# EAGLE board Ball Detection v4 Panel (EAGLE 9.2.2)
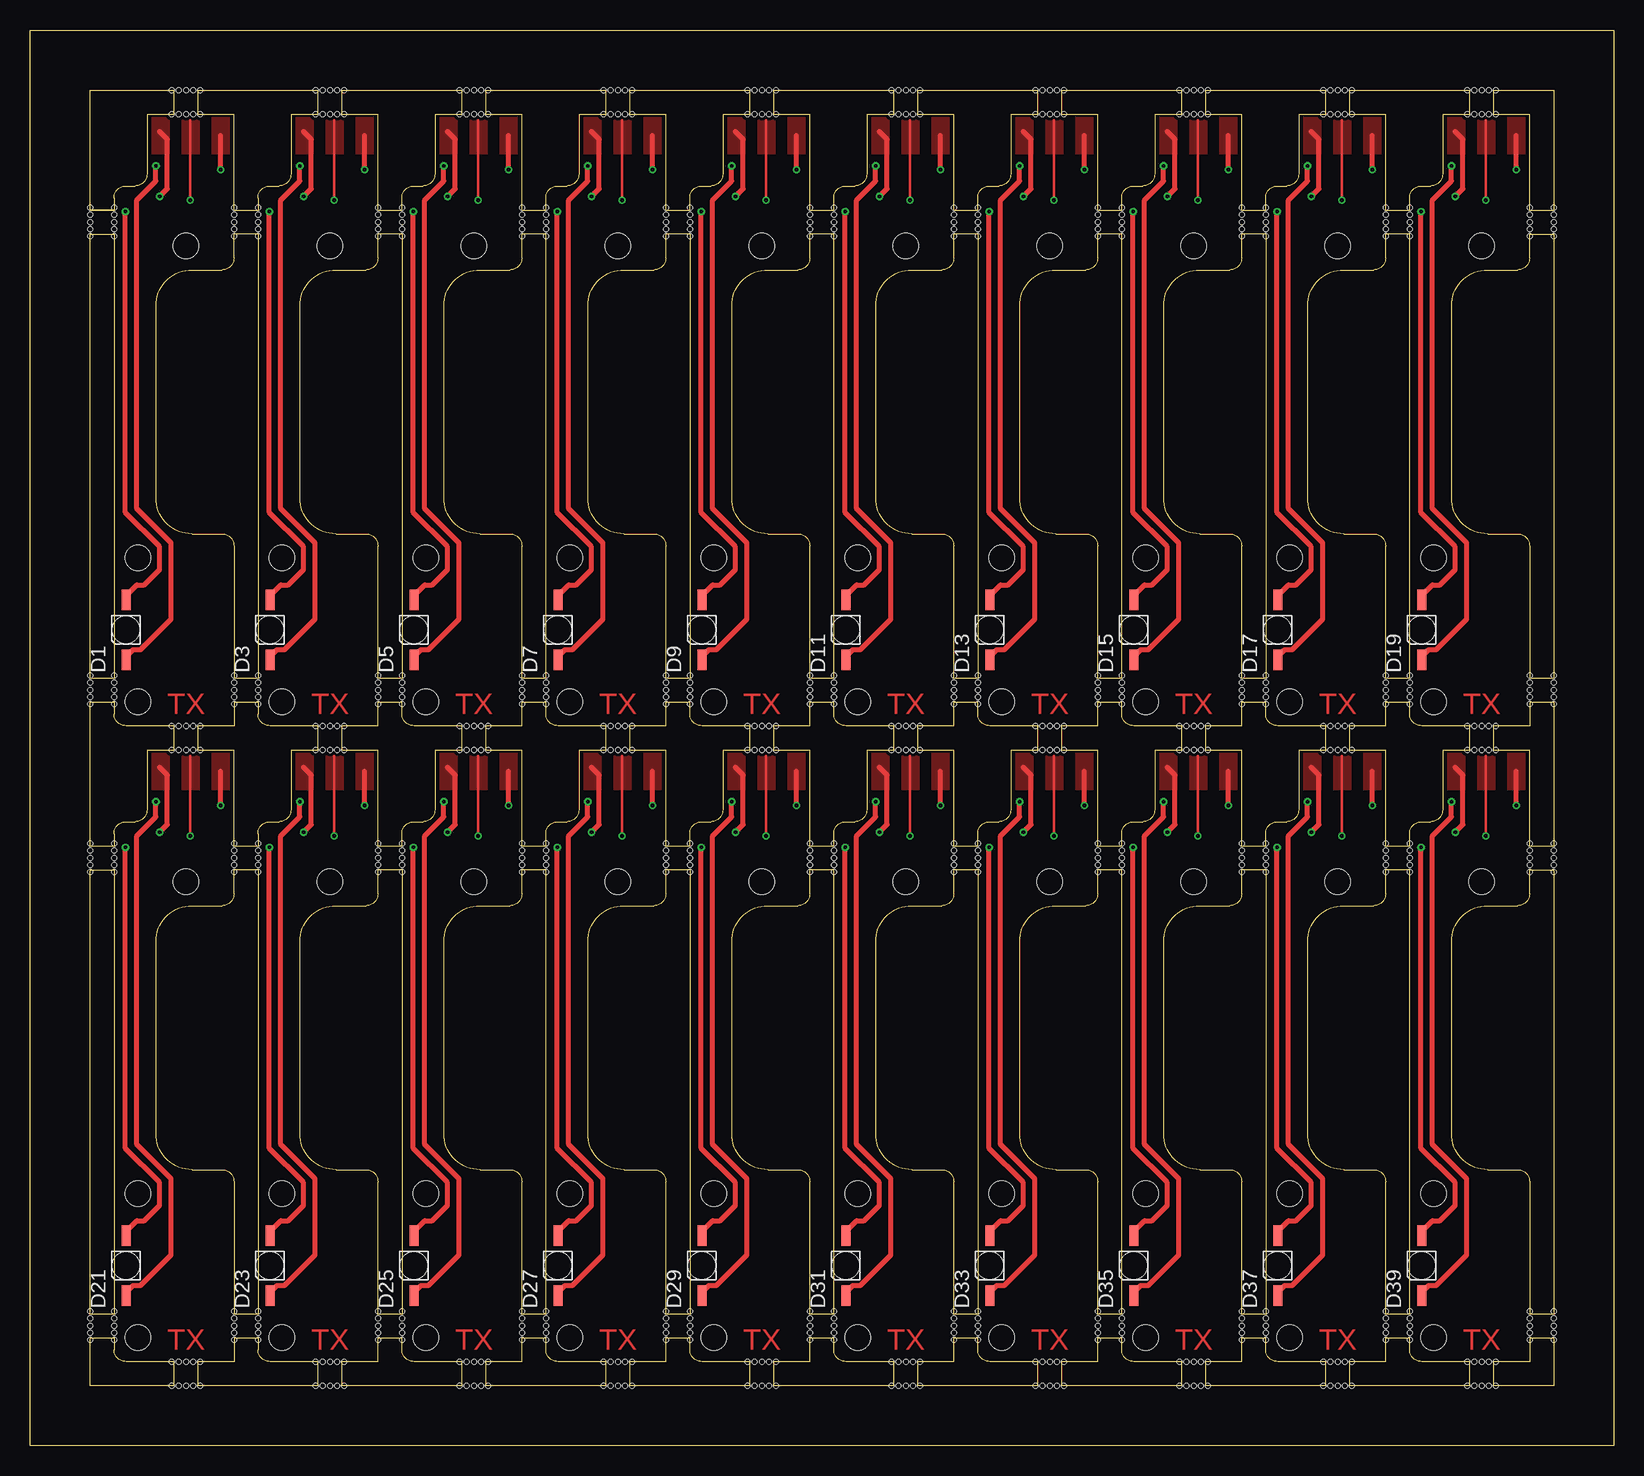
[diagram p0: board, top side]
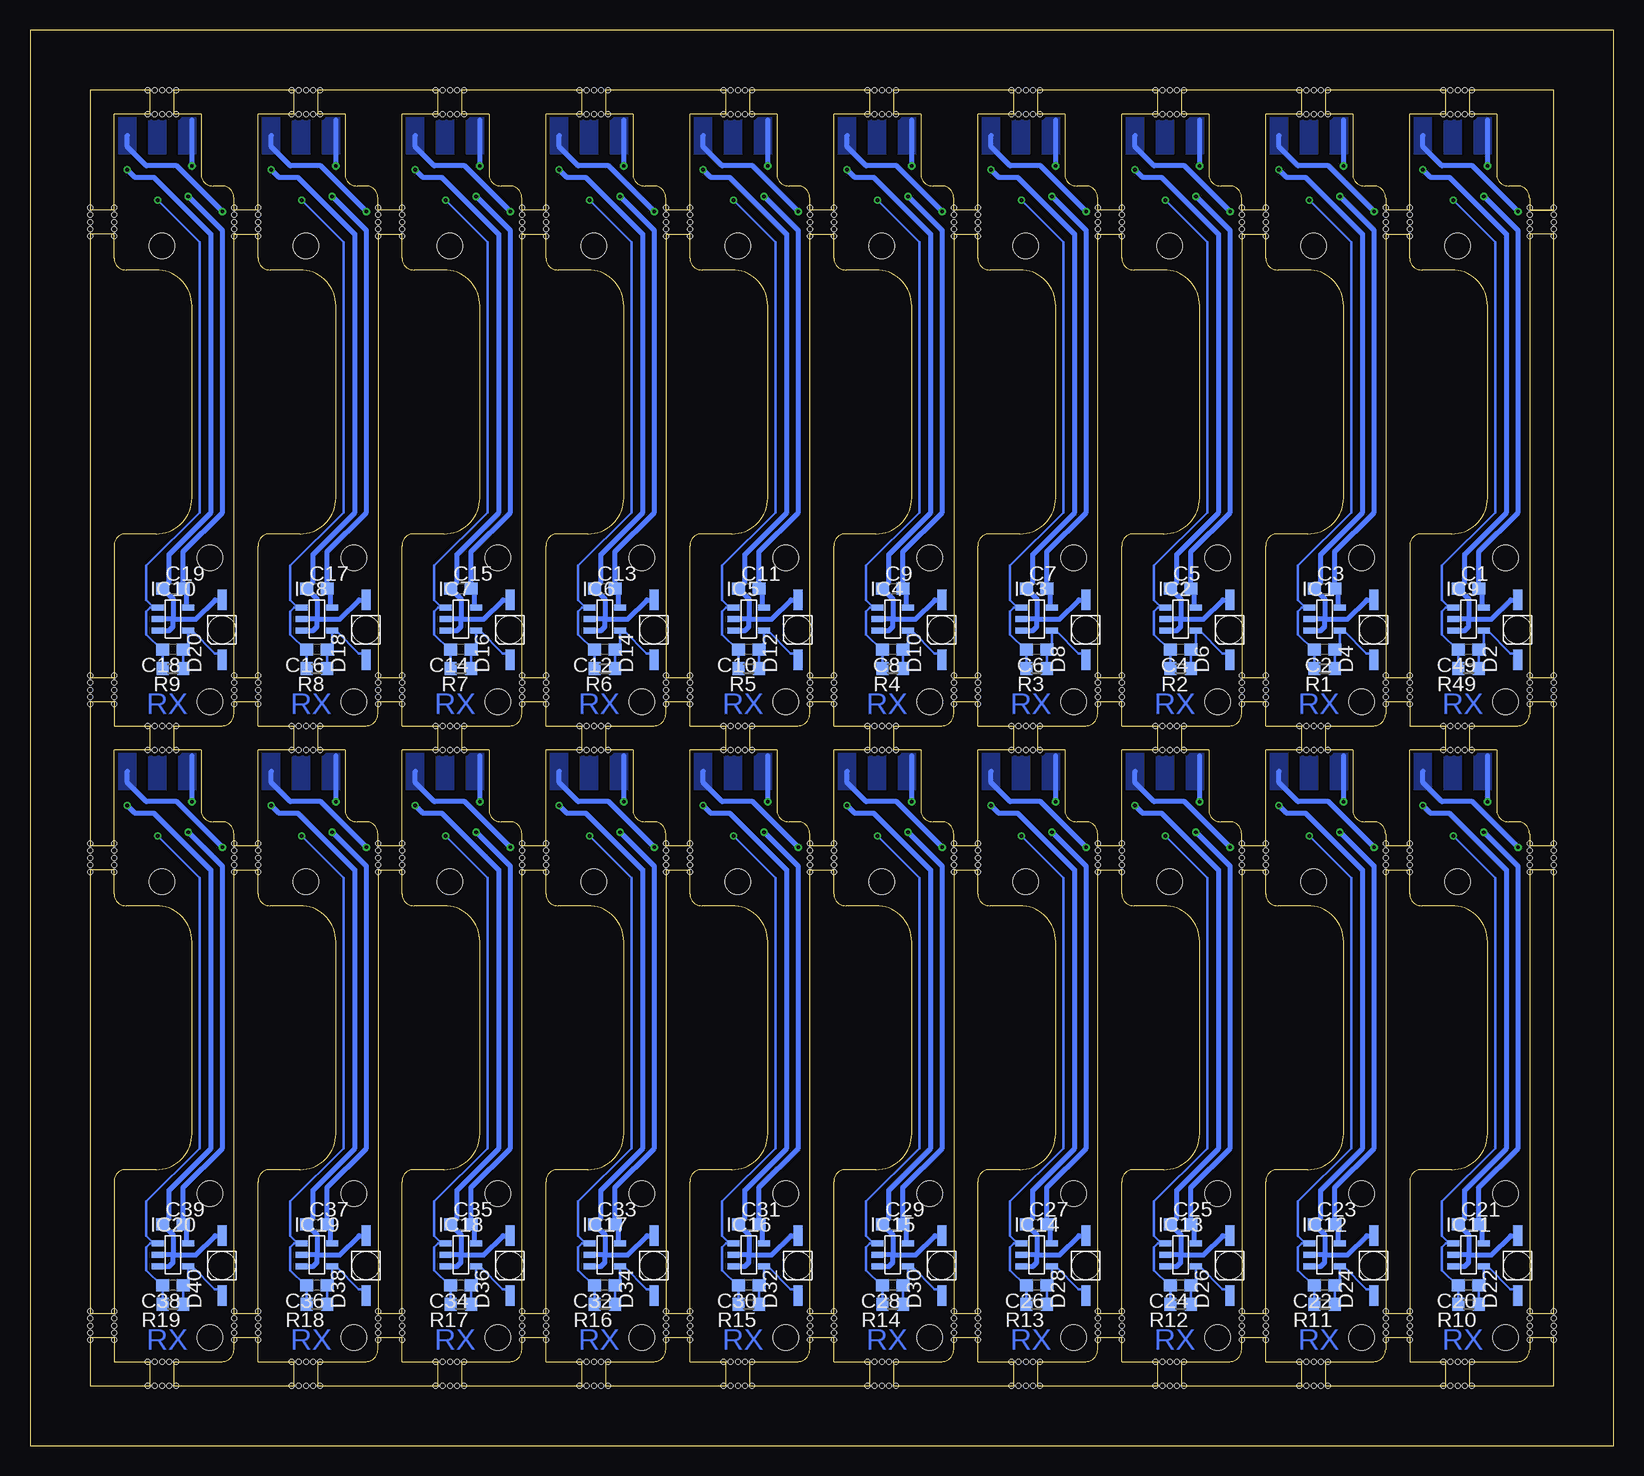
[diagram p1: board, bottom side, seen from below]

Size 132 x 118 mm. Coordinates in mm from the lower left corner, seen from the top.
Outline: 0,118 132,118 132,0 0,0 0,118
Copper layers (1*16): Top 0.035mm / dielectric 1.5mm / Bottom 0.035mm
Design rules "PCB-POOL Standard *": minimum track width 0.15mm, minimum drill 0.3mm, track to track 0.15mm, track to pad 0.15mm, pad to pad 0.15mm, via to via 0.15mm, smd to smd 0.15mm, copper to edge 0.3mm, drill to drill 0.2mm, minimum pad ring 0.2mm, minimum via ring 0.15mm, stop-mask expansion 0.075mm, vias tented up to drill 14mil, thermal gap 0.2mm
Net classes: 0 default: width 0.152 mm, clearance 0.152 mm
Holes 2.1 mm at 9,62 9,74 13,100 21,62 21,74 25,100 33,62 33,74 37,100 45,62 45,74 49,100 57,62 57,74 61,100 69,62 69,74 73,100 81,62 81,74 85,100 93,62 93,74 97,100 105,62 105,74 109,100 117,62 117,74 121,100 9,9 9,21 13,47 21,9 21,21 25,47 33,9 33,21 37,47 45,9 45,21 49,47 57,9 57,21 61,47 69,9 69,21 73,47 81,9 81,21 85,47 93,9 93,21 97,47 105,9 105,21 109,47 117,9 117,21 121,47
Holes 0.4 mm at 29,102 29,101.4 29,100.8 29,102.6 29,103.2 31,102 31,101.4 31,100.8 31,102.6 31,103.2 29,63 29,62.4 29,61.8 29,63.6 29,64.2 31,63 31,62.4 31,61.8 31,63.6 31,64.2 41,102 41,101.4 41,100.8 41,102.6 41,103.2 43,102 43,101.4 43,100.8 43,102.6 43,103.2 41,63 41,62.4 41,61.8 41,63.6 41,64.2 43,63 43,62.4 43,61.8 43,63.6 43,64.2 53,102 53,101.4 53,100.8 53,102.6 53,103.2 55,102 55,101.4 55,100.8 55,102.6 55,103.2 53,63 53,62.4 53,61.8 53,63.6 53,64.2 55,63 55,62.4 55,61.8 55,63.6 55,64.2 65,102 65,101.4 65,100.8 65,102.6 65,103.2 67,102 67,101.4 67,100.8 67,102.6 67,103.2 65,63 65,62.4 65,61.8 65,63.6 65,64.2 67,63 67,62.4 67,61.8 67,63.6 67,64.2 77,102 77,101.4 77,100.8 77,102.6 77,103.2 79,102 79,101.4 79,100.8 79,102.6 79,103.2 77,63 77,62.4 77,61.8 77,63.6 77,64.2 79,63 79,62.4 79,61.8 79,63.6 79,64.2 89,102 89,101.4 89,100.8 89,102.6 89,103.2 91,102 91,101.4 91,100.8 91,102.6 91,103.2 89,63 89,62.4 89,61.8 89,63.6 89,64.2 91,63 91,62.4 91,61.8 91,63.6 91,64.2 101,102 101,101.4 101,100.8 101,102.6 101,103.2 103,102 103,101.4 103,100.8 103,102.6 103,103.2 101,63 101,62.4 101,61.8 101,63.6 101,64.2 103,63 103,62.4 103,61.8 103,63.6 103,64.2 113,102 113,101.4 113,100.8 113,102.6 113,103.2 115,102 115,101.4 115,100.8 115,102.6 115,103.2 113,63 113,62.4 113,61.8 113,63.6 113,64.2 115,63 115,62.4 115,61.8 115,63.6 115,64.2 17,102 17,101.4 17,100.8 17,102.6 17,103.2 19,102 19,101.4 19,100.8 19,102.6 19,103.2 17,63 17,62.4 17,61.8 17,63.6 17,64.2 19,63 19,62.4 19,61.8 19,63.6 19,64.2 29,49 29,48.4 29,47.8 29,49.6 29,50.2 31,49 31,48.4 31,47.8 31,49.6 31,50.2 29,10 29,9.4 29,8.8 29,10.6 29,11.2 31,10 31,9.4 31,8.8 31,10.6 31,11.2 41,49 41,48.4 41,47.8 41,49.6 41,50.2 43,49 43,48.4 43,47.8 43,49.6 43,50.2 41,10 41,9.4 41,8.8 41,10.6 41,11.2 43,10 43,9.4 43,8.8 43,10.6 43,11.2 53,49 53,48.4 53,47.8 53,49.6 53,50.2 55,49 55,48.4 55,47.8 55,49.6 55,50.2 53,10 53,9.4 53,8.8 53,10.6 53,11.2 55,10 55,9.4 55,8.8 55,10.6 55,11.2 65,49 65,48.4 65,47.8 65,49.6 65,50.2 67,49 67,48.4 67,47.8 67,49.6 67,50.2 65,10 65,9.4 65,8.8 65,10.6 65,11.2 67,10 67,9.4 67,8.8 67,10.6 67,11.2 77,49 77,48.4 77,47.8 77,49.6 77,50.2 79,49 79,48.4 79,47.8 79,49.6 79,50.2 77,10 77,9.4 77,8.8 77,10.6 77,11.2 79,10 79,9.4 79,8.8 79,10.6 79,11.2 89,49 89,48.4 89,47.8 89,49.6 89,50.2 91,49 91,48.4 91,47.8 91,49.6 91,50.2 89,10 89,9.4 89,8.8 89,10.6 89,11.2 91,10 91,9.4 91,8.8 91,10.6 91,11.2 101,49 101,48.4 101,47.8 101,49.6 101,50.2 103,49 103,48.4 103,47.8 103,49.6 103,50.2 101,10 101,9.4 101,8.8 101,10.6 101,11.2 103,10 103,9.4 103,8.8 103,10.6 103,11.2 113,49 113,48.4 113,47.8 113,49.6 113,50.2 115,49 115,48.4 115,47.8 115,49.6 115,50.2 113,10 113,9.4 113,8.8 113,10.6 113,11.2 115,10 115,9.4 115,8.8 115,10.6 115,11.2 17,49 17,48.4 17,47.8 17,49.6 17,50.2 19,49 19,48.4 19,47.8 19,49.6 19,50.2 17,10 17,9.4 17,8.8 17,10.6 17,11.2 19,10 19,9.4 19,8.8 19,10.6 19,11.2 13,58 13.6,58 14.2,58 12.4,58 11.8,58 13,60 13.6,60 14.2,60 12.4,60 11.8,60 25,58 25.6,58 26.2,58 24.4,58 23.8,58 25,60 25.6,60 26.2,60 24.4,60 23.8,60 37,58 37.6,58 38.2,58 36.4,58 35.8,58 37,60 37.6,60 38.2,60 36.4,60 35.8,60 49,58 49.6,58 50.2,58 48.4,58 47.8,58 49,60 49.6,60 50.2,60 48.4,60 47.8,60 61,58 61.6,58 62.2,58 60.4,58 59.8,58 61,60 61.6,60 62.2,60 60.4,60 59.8,60 73,58 73.6,58 74.2,58 72.4,58 71.8,58 73,60 73.6,60 74.2,60 72.4,60 71.8,60 85,58 85.6,58 86.2,58 84.4,58 83.8,58 85,60 85.6,60 86.2,60 84.4,60 83.8,60 97,58 97.6,58 98.2,58 96.4,58 95.8,58 97,60 97.6,60 98.2,60 96.4,60 95.8,60 109,58 109.6,58 110.2,58 108.4,58 107.8,58 109,60 109.6,60 110.2,60 108.4,60 107.8,60 121,58 121.6,58 122.2,58 120.4,58 119.8,58 121,60 121.6,60 122.2,60 120.4,60 119.8,60 13,5 13.6,5 14.2,5 12.4,5 11.8,5 13,7 13.6,7 14.2,7 12.4,7 11.8,7 25,5 25.6,5 26.2,5 24.4,5 23.8,5 25,7 25.6,7 26.2,7 24.4,7 23.8,7 37,5 37.6,5 38.2,5 36.4,5 35.8,5 37,7 37.6,7 38.2,7 36.4,7 35.8,7 49,5 49.6,5 50.2,5 48.4,5 47.8,5 49,7 49.6,7 50.2,7 48.4,7 47.8,7 61,5 61.6,5 62.2,5 60.4,5 59.8,5 61,7 61.6,7 62.2,7 60.4,7 59.8,7 73,5 73.6,5 74.2,5 72.4,5 71.8,5 73,7 73.6,7 74.2,7 72.4,7 71.8,7 85,5 85.6,5 86.2,5 84.4,5 83.8,5 85,7 85.6,7 86.2,7 84.4,7 83.8,7 97,5 97.6,5 98.2,5 96.4,5 95.8,5 97,7 97.6,7 98.2,7 96.4,7 95.8,7 109,5 109.6,5 110.2,5 108.4,5 107.8,5 109,7 109.6,7 110.2,7 108.4,7 107.8,7 121,5 121.6,5 122.2,5 120.4,5 119.8,5 121,7 121.6,7 122.2,7 120.4,7 119.8,7 13,111 13.6,111 14.2,111 12.4,111 11.8,111 13,113 13.6,113 14.2,113 12.4,113 11.8,113 25,111 25.6,111 26.2,111 24.4,111 23.8,111 25,113 25.6,113 26.2,113 24.4,113 23.8,113 37,111 37.6,111 38.2,111 36.4,111 35.8,111 37,113 37.6,113 38.2,113 36.4,113 35.8,113 49,111 49.6,111 50.2,111 48.4,111 47.8,111 49,113 49.6,113 50.2,113 48.4,113 47.8,113 61,111 61.6,111 62.2,111 60.4,111 59.8,111 61,113 61.6,113 62.2,113 60.4,113 59.8,113 73,111 73.6,111 74.2,111 72.4,111 71.8,111 73,113 73.6,113 74.2,113 72.4,113 71.8,113 85,111 85.6,111 86.2,111 84.4,111 83.8,111 85,113 85.6,113 86.2,113 84.4,113 83.8,113 97,111 97.6,111 98.2,111 96.4,111 95.8,111 97,113 97.6,113 98.2,113 96.4,113 95.8,113 109,111 109.6,111 110.2,111 108.4,111 107.8,111 109,113 109.6,113 110.2,113 108.4,113 107.8,113 121,111 121.6,111 122.2,111 120.4,111 119.8,111 121,113 121.6,113 122.2,113 120.4,113 119.8,113 5,102 5,101.4 5,100.8 5,102.6 5,103.2 7,102 7,101.4 7,100.8 7,102.6 7,103.2 5,63 5,62.4 5,61.8 5,63.6 5,64.2 7,63 7,62.4 7,61.8 7,63.6 7,64.2 5,49 5,48.4 5,47.8 5,49.6 5,50.2 7,49 7,48.4 7,47.8 7,49.6 7,50.2 5,10 5,9.4 5,8.8 5,10.6 5,11.2 7,10 7,9.4 7,8.8 7,10.6 7,11.2 125,10 125,9.4 125,8.8 125,10.6 125,11.2 127,10 127,9.4 127,8.8 127,10.6 127,11.2 125,49 125,48.4 125,47.8 125,49.6 125,50.2 127,49 127,48.4 127,47.8 127,49.6 127,50.2 125,63 125,62.4 125,61.8 125,63.6 125,64.2 127,63 127,62.4 127,61.8 127,63.6 127,64.2 125,102 125,101.4 125,100.8 125,102.6 125,103.2 127,102 127,101.4 127,100.8 127,102.6 127,103.2
tKeepout: area 11,98 to 15,102
Milling: 656 lines

## Footprints (pad centres in the part's own frame; a part is rotated, then mirrored left to right if it is on the bottom)
C0603 = smd 1.1 x 1: 1 -0.85,0; 2 0.85,0
LED-GULLR = smd 1.7 x 0.75: A 2.5,0; C -2.5,0 | hole 2.3: 0,0
SOT23-5 = smd 1.016 x 0.508: 1 -1.27,0.953; 2 -1.27,0; 3 -1.27,-0.953; 4 1.27,-0.953; 5 1.27,0.953
R0603 = smd 1 x 1.1: 1 -0.85,0; 2 0.85,0

## Placement (x,y rotation side)
C1  10u  [C0603]  12.08,71.43 0 bottom
C2  10p  [C0603]  24.08,66.35 180 bottom
C3  10u  [C0603]  24.08,71.43 0 bottom
C4  10p  [C0603]  36.08,66.35 180 bottom
C5  10u  [C0603]  36.08,71.43 0 bottom
C6  10p  [C0603]  48.08,66.35 180 bottom
C7  10u  [C0603]  48.08,71.43 0 bottom
C8  10p  [C0603]  60.08,66.35 180 bottom
C9  10u  [C0603]  60.08,71.43 0 bottom
C10  10p  [C0603]  72.08,66.35 180 bottom
C11  10u  [C0603]  72.08,71.43 0 bottom
C12  10p  [C0603]  84.08,66.35 180 bottom
C13  10u  [C0603]  84.08,71.43 0 bottom
C14  10p  [C0603]  96.08,66.35 180 bottom
C15  10u  [C0603]  96.08,71.43 0 bottom
C16  10p  [C0603]  108.08,66.35 180 bottom
C17  10u  [C0603]  108.08,71.43 0 bottom
C18  10p  [C0603]  120.08,66.35 180 bottom
C19  10u  [C0603]  120.08,71.43 0 bottom
C20  10p  [C0603]  12.08,13.35 180 bottom
C21  10u  [C0603]  12.08,18.43 0 bottom
C22  10p  [C0603]  24.08,13.35 180 bottom
C23  10u  [C0603]  24.08,18.43 0 bottom
C24  10p  [C0603]  36.08,13.35 180 bottom
C25  10u  [C0603]  36.08,18.43 0 bottom
C26  10p  [C0603]  48.08,13.35 180 bottom
C27  10u  [C0603]  48.08,18.43 0 bottom
C28  10p  [C0603]  60.08,13.35 180 bottom
C29  10u  [C0603]  60.08,18.43 0 bottom
C30  10p  [C0603]  72.08,13.35 180 bottom
C31  10u  [C0603]  72.08,18.43 0 bottom
C32  10p  [C0603]  84.08,13.35 180 bottom
C33  10u  [C0603]  84.08,18.43 0 bottom
C34  10p  [C0603]  96.08,13.35 180 bottom
C35  10u  [C0603]  96.08,18.43 0 bottom
C36  10p  [C0603]  108.08,13.35 180 bottom
C37  10u  [C0603]  108.08,18.43 0 bottom
C38  10p  [C0603]  120.08,13.35 180 bottom
C39  10u  [C0603]  120.08,18.43 0 bottom
C49  10p  [C0603]  12.08,66.35 180 bottom
D1  VSMB2000X01  [LED-GULLR]  8,68 90 top
D2  TEMD1000  [LED-GULLR]  8,68 90 bottom
D3  VSMB2000X01  [LED-GULLR]  20,68 90 top
D4  TEMD1000  [LED-GULLR]  20,68 90 bottom
D5  VSMB2000X01  [LED-GULLR]  32,68 90 top
D6  TEMD1000  [LED-GULLR]  32,68 90 bottom
D7  VSMB2000X01  [LED-GULLR]  44,68 90 top
D8  TEMD1000  [LED-GULLR]  44,68 90 bottom
D9  VSMB2000X01  [LED-GULLR]  56,68 90 top
D10  TEMD1000  [LED-GULLR]  56,68 90 bottom
D11  VSMB2000X01  [LED-GULLR]  68,68 90 top
D12  TEMD1000  [LED-GULLR]  68,68 90 bottom
D13  VSMB2000X01  [LED-GULLR]  80,68 90 top
D14  TEMD1000  [LED-GULLR]  80,68 90 bottom
D15  VSMB2000X01  [LED-GULLR]  92,68 90 top
D16  TEMD1000  [LED-GULLR]  92,68 90 bottom
D17  VSMB2000X01  [LED-GULLR]  104,68 90 top
D18  TEMD1000  [LED-GULLR]  104,68 90 bottom
D19  VSMB2000X01  [LED-GULLR]  116,68 90 top
D20  TEMD1000  [LED-GULLR]  116,68 90 bottom
D21  VSMB2000X01  [LED-GULLR]  8,15 90 top
D22  TEMD1000  [LED-GULLR]  8,15 90 bottom
D23  VSMB2000X01  [LED-GULLR]  20,15 90 top
D24  TEMD1000  [LED-GULLR]  20,15 90 bottom
D25  VSMB2000X01  [LED-GULLR]  32,15 90 top
D26  TEMD1000  [LED-GULLR]  32,15 90 bottom
D27  VSMB2000X01  [LED-GULLR]  44,15 90 top
D28  TEMD1000  [LED-GULLR]  44,15 90 bottom
D29  VSMB2000X01  [LED-GULLR]  56,15 90 top
D30  TEMD1000  [LED-GULLR]  56,15 90 bottom
D31  VSMB2000X01  [LED-GULLR]  68,15 90 top
D32  TEMD1000  [LED-GULLR]  68,15 90 bottom
D33  VSMB2000X01  [LED-GULLR]  80,15 90 top
D34  TEMD1000  [LED-GULLR]  80,15 90 bottom
D35  VSMB2000X01  [LED-GULLR]  92,15 90 top
D36  TEMD1000  [LED-GULLR]  92,15 90 bottom
D37  VSMB2000X01  [LED-GULLR]  104,15 90 top
D38  TEMD1000  [LED-GULLR]  104,15 90 bottom
D39  VSMB2000X01  [LED-GULLR]  116,15 90 top
D40  TEMD1000  [LED-GULLR]  116,15 90 bottom
IC1  OPA320  [SOT23-5]  24.08,68.89 0 bottom
IC2  OPA320  [SOT23-5]  36.08,68.89 0 bottom
IC3  OPA320  [SOT23-5]  48.08,68.89 0 bottom
IC4  OPA320  [SOT23-5]  60.08,68.89 0 bottom
IC5  OPA320  [SOT23-5]  72.08,68.89 0 bottom
IC6  OPA320  [SOT23-5]  84.08,68.89 0 bottom
IC7  OPA320  [SOT23-5]  96.08,68.89 0 bottom
IC8  OPA320  [SOT23-5]  108.08,68.89 0 bottom
IC9  OPA320  [SOT23-5]  12.08,68.89 0 bottom
IC10  OPA320  [SOT23-5]  120.08,68.89 0 bottom
IC11  OPA320  [SOT23-5]  12.08,15.89 0 bottom
IC12  OPA320  [SOT23-5]  24.08,15.89 0 bottom
IC13  OPA320  [SOT23-5]  36.08,15.89 0 bottom
IC14  OPA320  [SOT23-5]  48.08,15.89 0 bottom
IC15  OPA320  [SOT23-5]  60.08,15.89 0 bottom
IC16  OPA320  [SOT23-5]  72.08,15.89 0 bottom
IC17  OPA320  [SOT23-5]  84.08,15.89 0 bottom
IC18  OPA320  [SOT23-5]  96.08,15.89 0 bottom
IC19  OPA320  [SOT23-5]  108.08,15.89 0 bottom
IC20  OPA320  [SOT23-5]  120.08,15.89 0 bottom
R1  1M  [R0603]  24.08,64.76 180 bottom
R2  1M  [R0603]  36.08,64.76 180 bottom
R3  1M  [R0603]  48.08,64.76 180 bottom
R4  1M  [R0603]  60.08,64.76 180 bottom
R5  1M  [R0603]  72.08,64.76 180 bottom
R6  1M  [R0603]  84.08,64.76 180 bottom
R7  1M  [R0603]  96.08,64.76 180 bottom
R8  1M  [R0603]  108.08,64.76 180 bottom
R9  1M  [R0603]  120.08,64.76 180 bottom
R10  1M  [R0603]  12.08,11.76 180 bottom
R11  1M  [R0603]  24.08,11.76 180 bottom
R12  1M  [R0603]  36.08,11.76 180 bottom
R13  1M  [R0603]  48.08,11.76 180 bottom
R14  1M  [R0603]  60.08,11.76 180 bottom
R15  1M  [R0603]  72.08,11.76 180 bottom
R16  1M  [R0603]  84.08,11.76 180 bottom
R17  1M  [R0603]  96.08,11.76 180 bottom
R18  1M  [R0603]  108.08,11.76 180 bottom
R19  1M  [R0603]  120.08,11.76 180 bottom
R49  1M  [R0603]  12.08,64.76 180 bottom

## Library data of the parts
C1-C39 C49 R1-R19 R49 = rcl
D1-D40 IC1-IC20 = Marvin

## Nets
GND: C1.1 D2.A IC9.2 IC9.3
GND1: C3.1 D4.A IC1.2 IC1.3
GND2: C5.1 D6.A IC2.2 IC2.3
GND3: C7.1 D8.A IC3.2 IC3.3
GND4: C9.1 D10.A IC4.2 IC4.3
GND5: C11.1 D12.A IC5.2 IC5.3
GND6: C13.1 D14.A IC6.2 IC6.3
GND7: C15.1 D16.A IC7.2 IC7.3
GND8: C17.1 D18.A IC8.2 IC8.3
GND9: C19.1 D20.A IC10.2 IC10.3
GND10: C21.1 D22.A IC11.2 IC11.3
GND11: C23.1 D24.A IC12.2 IC12.3
GND12: C25.1 D26.A IC13.2 IC13.3
GND13: C27.1 D28.A IC14.2 IC14.3
GND14: C29.1 D30.A IC15.2 IC15.3
GND15: C31.1 D32.A IC16.2 IC16.3
GND16: C33.1 D34.A IC17.2 IC17.3
GND17: C35.1 D36.A IC18.2 IC18.3
GND18: C37.1 D38.A IC19.2 IC19.3
GND19: C39.1 D40.A IC20.2 IC20.3
IR-ADC: C49.2 IC9.1 R49.2
IR-ADC1: C2.2 IC1.1 R1.2
IR-ADC2: C4.2 IC2.1 R2.2
IR-ADC3: C6.2 IC3.1 R3.2
IR-ADC4: C8.2 IC4.1 R4.2
IR-ADC5: C10.2 IC5.1 R5.2
IR-ADC6: C12.2 IC6.1 R6.2
IR-ADC7: C14.2 IC7.1 R7.2
IR-ADC8: C16.2 IC8.1 R8.2
IR-ADC9: C18.2 IC10.1 R9.2
IR-ADC10: C20.2 IC11.1 R10.2
IR-ADC11: C22.2 IC12.1 R11.2
IR-ADC12: C24.2 IC13.1 R12.2
IR-ADC13: C26.2 IC14.1 R13.2
IR-ADC14: C28.2 IC15.1 R14.2
IR-ADC15: C30.2 IC16.1 R15.2
IR-ADC16: C32.2 IC17.1 R16.2
IR-ADC17: C34.2 IC18.1 R17.2
IR-ADC18: C36.2 IC19.1 R18.2
IR-ADC19: C38.2 IC20.1 R19.2
N$1: C2.1 D4.C IC1.4 R1.1
N$2: C4.1 D6.C IC2.4 R2.1
N$3: C6.1 D8.C IC3.4 R3.1
N$4: C8.1 D10.C IC4.4 R4.1
N$5: C10.1 D12.C IC5.4 R5.1
N$6: C12.1 D14.C IC6.4 R6.1
N$7: C14.1 D16.C IC7.4 R7.1
N$8: C16.1 D18.C IC8.4 R8.1
N$9: C18.1 D20.C IC10.4 R9.1
N$10: C20.1 D22.C IC11.4 R10.1
N$11: C22.1 D24.C IC12.4 R11.1
N$12: C24.1 D26.C IC13.4 R12.1
N$13: C26.1 D28.C IC14.4 R13.1
N$14: C28.1 D30.C IC15.4 R14.1
N$15: C30.1 D32.C IC16.4 R15.1
N$16: C32.1 D34.C IC17.4 R16.1
N$17: C34.1 D36.C IC18.4 R17.1
N$18: C36.1 D38.C IC19.4 R18.1
N$19: C38.1 D40.C IC20.4 R19.1
N$114: C49.1 D2.C IC9.4 R49.1
RX+3V1: C3.2 IC1.5
RX+3V2: C5.2 IC2.5
RX+3V3: C1.2 IC9.5
RX+3V4: C7.2 IC3.5
RX+3V5: C9.2 IC4.5
RX+3V6: C11.2 IC5.5
RX+3V7: C13.2 IC6.5
RX+3V8: C15.2 IC7.5
RX+3V9: C17.2 IC8.5
RX+3V10: C19.2 IC10.5
RX+3V11: C21.2 IC11.5
RX+3V12: C23.2 IC12.5
RX+3V13: C25.2 IC13.5
RX+3V14: C27.2 IC14.5
RX+3V15: C29.2 IC15.5
RX+3V16: C31.2 IC16.5
RX+3V17: C33.2 IC17.5
RX+3V18: C35.2 IC18.5
RX+3V19: C37.2 IC19.5
RX+3V20: C39.2 IC20.5
TX+3V1: D3.A
TX+3V2: D5.A
TX+3V3: D1.A
TX+3V4: D7.A
TX+3V5: D9.A
TX+3V6: D11.A
TX+3V7: D13.A
TX+3V8: D15.A
TX+3V9: D17.A
TX+3V10: D19.A
TX+3V11: D21.A
TX+3V12: D23.A
TX+3V13: D25.A
TX+3V14: D27.A
TX+3V15: D29.A
TX+3V16: D31.A
TX+3V17: D33.A
TX+3V18: D35.A
TX+3V19: D37.A
TX+3V20: D39.A
TX-LED: D1.C
TX-LED1: D3.C
TX-LED2: D5.C
TX-LED3: D7.C
TX-LED4: D9.C
TX-LED5: D11.C
TX-LED6: D13.C
TX-LED7: D15.C
TX-LED8: D17.C
TX-LED9: D19.C
TX-LED10: D21.C
TX-LED11: D23.C
TX-LED12: D25.C
TX-LED13: D27.C
TX-LED14: D29.C
TX-LED15: D31.C
TX-LED16: D33.C
TX-LED17: D35.C
TX-LED18: D37.C
TX-LED19: D39.C

## Tracks (layer width: path | path; a pad name or v marks a point on that pad's centre or on a via)
GND  (via drill 0.3)
  Top 0.406: v15.89,106.35 15.89,109.21
  Bottom 0.406: 12.08,68.89 12.08,70.58 C1.1 12.4,71.96 12.4,74.29 8.9,77.78 8.9,100.96 13.67,105.72 15.26,105.72 v15.89,106.35 | 12.08,68.89 10.18,68.89 8.56,70.5 D2.A | 12.08,68.89 IC9.2 | IC9.3 12.4,67.94 12.08,68.25 12.08,68.89
  pour Top (no thermals): 15.15,110.7 15.15,107.7 16.65,107.7 16.65,110.7
GND1  (via drill 0.3)
  Top 0.406: v27.89,106.35 27.89,109.21
  Bottom 0.406: 24.08,68.89 24.08,70.58 C3.1 24.4,71.96 24.4,74.29 20.91,77.78 20.91,100.96 25.67,105.72 27.25,105.72 v27.89,106.35 | 24.08,68.89 22.18,68.89 20.56,70.5 D4.A | 24.08,68.89 IC1.2 | IC1.3 24.4,67.94 24.08,68.25 24.08,68.89
  pour Top (no thermals): 27.15,110.7 27.15,107.7 28.65,107.7 28.65,110.7
GND2  (via drill 0.3)
  Top 0.406: v39.89,106.35 39.89,109.21
  Bottom 0.406: 36.08,68.89 36.08,70.58 C5.1 36.4,71.96 36.4,74.29 32.91,77.78 32.91,100.96 37.67,105.72 39.26,105.72 v39.89,106.35 | 36.08,68.89 34.17,68.89 32.56,70.5 D6.A | 36.08,68.89 IC2.2 | IC2.3 36.4,67.94 36.08,68.25 36.08,68.89
  pour Top (no thermals): 39.15,110.7 39.15,107.7 40.65,107.7 40.65,110.7
GND3  (via drill 0.3)
  Top 0.406: v51.89,106.35 51.89,109.21
  Bottom 0.406: 48.08,68.89 48.08,70.58 C7.1 48.4,71.96 48.4,74.29 44.91,77.78 44.91,100.96 49.67,105.72 51.26,105.72 v51.89,106.35 | 48.08,68.89 46.17,68.89 44.56,70.5 D8.A | 48.08,68.89 IC3.2 | IC3.3 48.4,67.94 48.08,68.25 48.08,68.89
  pour Top (no thermals): 51.15,110.7 51.15,107.7 52.65,107.7 52.65,110.7
GND4  (via drill 0.3)
  Top 0.406: v63.89,106.35 63.89,109.21
  Bottom 0.406: 60.08,68.89 60.08,70.58 C9.1 60.4,71.96 60.4,74.29 56.91,77.78 56.91,100.96 61.67,105.72 63.26,105.72 v63.89,106.35 | 60.08,68.89 58.17,68.89 56.56,70.5 D10.A | 60.08,68.89 IC4.2 | IC4.3 60.4,67.94 60.08,68.25 60.08,68.89
  pour Top (no thermals): 63.15,110.7 63.15,107.7 64.65,107.7 64.65,110.7
GND5  (via drill 0.3)
  Top 0.406: v75.89,106.35 75.89,109.21
  Bottom 0.406: 72.08,68.89 72.08,70.58 C11.1 72.4,71.96 72.4,74.29 68.91,77.78 68.91,100.96 73.67,105.72 75.25,105.72 v75.89,106.35 | 72.08,68.89 70.17,68.89 68.56,70.5 D12.A | 72.08,68.89 IC5.2 | IC5.3 72.4,67.94 72.08,68.25 72.08,68.89
  pour Top (no thermals): 75.15,110.7 75.15,107.7 76.65,107.7 76.65,110.7
GND6  (via drill 0.3)
  Top 0.406: v87.89,106.35 87.89,109.21
  Bottom 0.406: 84.08,68.89 84.08,70.58 C13.1 84.4,71.96 84.4,74.29 80.91,77.78 80.91,100.96 85.67,105.72 87.25,105.72 v87.89,106.35 | 84.08,68.89 82.17,68.89 80.56,70.5 D14.A | 84.08,68.89 IC6.2 | IC6.3 84.4,67.94 84.08,68.25 84.08,68.89
  pour Top (no thermals): 87.15,110.7 87.15,107.7 88.65,107.7 88.65,110.7
GND7  (via drill 0.3)
  Top 0.406: v99.89,106.35 99.89,109.21
  Bottom 0.406: 96.08,68.89 96.08,70.58 C15.1 96.4,71.96 96.4,74.29 92.91,77.78 92.91,100.96 97.67,105.72 99.25,105.72 v99.89,106.35 | 96.08,68.89 94.17,68.89 92.56,70.5 D16.A | 96.08,68.89 IC7.2 | IC7.3 96.4,67.94 96.08,68.25 96.08,68.89
  pour Top (no thermals): 99.15,110.7 99.15,107.7 100.65,107.7 100.65,110.7
GND8  (via drill 0.3)
  Top 0.406: v111.89,106.35 111.89,109.21
  Bottom 0.406: 108.08,68.89 108.08,70.58 C17.1 108.4,71.96 108.4,74.29 104.91,77.78 104.91,100.96 109.67,105.72 111.25,105.72 v111.89,106.35 | 108.08,68.89 106.17,68.89 104.56,70.5 D18.A | 108.08,68.89 IC8.2 | IC8.3 108.4,67.94 108.08,68.25 108.08,68.89
  pour Top (no thermals): 111.15,110.7 111.15,107.7 112.65,107.7 112.65,110.7
GND9  (via drill 0.3)
  Top 0.406: v123.89,106.35 123.89,109.21
  Bottom 0.406: 120.08,68.89 120.08,70.58 C19.1 120.4,71.96 120.4,74.29 116.91,77.78 116.91,100.96 121.67,105.72 123.25,105.72 v123.89,106.35 | 120.08,68.89 118.17,68.89 116.56,70.5 D20.A | 120.08,68.89 IC10.2 | IC10.3 120.4,67.94 120.08,68.25 120.08,68.89
  pour Top (no thermals): 123.15,110.7 123.15,107.7 124.65,107.7 124.65,110.7
GND10  (via drill 0.3)
  Top 0.406: v15.89,53.36 15.89,56.21
  Bottom 0.406: 12.08,15.89 12.08,17.58 C21.1 12.4,18.96 12.4,21.29 8.9,24.78 8.9,47.96 13.67,52.72 15.26,52.72 v15.89,53.36 | 12.08,15.89 10.18,15.89 8.56,17.5 D22.A | 12.08,15.89 IC11.2 | IC11.3 12.4,14.94 12.08,15.26 12.08,15.89
  pour Top (no thermals): 15.15,57.7 15.15,54.7 16.65,54.7 16.65,57.7
GND11  (via drill 0.3)
  Top 0.406: v27.89,53.36 27.89,56.21
  Bottom 0.406: 24.08,15.89 24.08,17.58 C23.1 24.4,18.96 24.4,21.29 20.91,24.78 20.91,47.96 25.67,52.72 27.25,52.72 v27.89,53.36 | 24.08,15.89 22.18,15.89 20.56,17.5 D24.A | 24.08,15.89 IC12.2 | IC12.3 24.4,14.94 24.08,15.26 24.08,15.89
  pour Top (no thermals): 27.15,57.7 27.15,54.7 28.65,54.7 28.65,57.7
GND12  (via drill 0.3)
  Top 0.406: v39.89,53.36 39.89,56.21
  Bottom 0.406: 36.08,15.89 36.08,17.58 C25.1 36.4,18.96 36.4,21.29 32.91,24.78 32.91,47.96 37.67,52.72 39.26,52.72 v39.89,53.36 | 36.08,15.89 34.17,15.89 32.56,17.5 D26.A | 36.08,15.89 IC13.2 | IC13.3 36.4,14.94 36.08,15.26 36.08,15.89
  pour Top (no thermals): 39.15,57.7 39.15,54.7 40.65,54.7 40.65,57.7
GND13  (via drill 0.3)
  Top 0.406: v51.89,53.36 51.89,56.21
  Bottom 0.406: 48.08,15.89 48.08,17.58 C27.1 48.4,18.96 48.4,21.29 44.91,24.78 44.91,47.96 49.67,52.72 51.26,52.72 v51.89,53.36 | 48.08,15.89 46.17,15.89 44.56,17.5 D28.A | 48.08,15.89 IC14.2 | IC14.3 48.4,14.94 48.08,15.26 48.08,15.89
  pour Top (no thermals): 51.15,57.7 51.15,54.7 52.65,54.7 52.65,57.7
GND14  (via drill 0.3)
  Top 0.406: v63.89,53.36 63.89,56.21
  Bottom 0.406: 60.08,15.89 60.08,17.58 C29.1 60.4,18.96 60.4,21.29 56.91,24.78 56.91,47.96 61.67,52.72 63.26,52.72 v63.89,53.36 | 60.08,15.89 58.17,15.89 56.56,17.5 D30.A | 60.08,15.89 IC15.2 | IC15.3 60.4,14.94 60.08,15.26 60.08,15.89
  pour Top (no thermals): 63.15,57.7 63.15,54.7 64.65,54.7 64.65,57.7
GND15  (via drill 0.3)
  Top 0.406: v75.89,53.36 75.89,56.21
  Bottom 0.406: 72.08,15.89 72.08,17.58 C31.1 72.4,18.96 72.4,21.29 68.91,24.78 68.91,47.96 73.67,52.72 75.25,52.72 v75.89,53.36 | 72.08,15.89 70.17,15.89 68.56,17.5 D32.A | 72.08,15.89 IC16.2 | IC16.3 72.4,14.94 72.08,15.26 72.08,15.89
  pour Top (no thermals): 75.15,57.7 75.15,54.7 76.65,54.7 76.65,57.7
GND16  (via drill 0.3)
  Top 0.406: v87.89,53.36 87.89,56.21
  Bottom 0.406: 84.08,15.89 84.08,17.58 C33.1 84.4,18.96 84.4,21.29 80.91,24.78 80.91,47.96 85.67,52.72 87.25,52.72 v87.89,53.36 | 84.08,15.89 82.17,15.89 80.56,17.5 D34.A | 84.08,15.89 IC17.2 | IC17.3 84.4,14.94 84.08,15.26 84.08,15.89
  pour Top (no thermals): 87.15,57.7 87.15,54.7 88.65,54.7 88.65,57.7
GND17  (via drill 0.3)
  Top 0.406: v99.89,53.36 99.89,56.21
  Bottom 0.406: 96.08,15.89 96.08,17.58 C35.1 96.4,18.96 96.4,21.29 92.91,24.78 92.91,47.96 97.67,52.72 99.25,52.72 v99.89,53.36 | 96.08,15.89 94.17,15.89 92.56,17.5 D36.A | 96.08,15.89 IC18.2 | IC18.3 96.4,14.94 96.08,15.26 96.08,15.89
  pour Top (no thermals): 99.15,57.7 99.15,54.7 100.65,54.7 100.65,57.7
GND18  (via drill 0.3)
  Top 0.406: v111.89,53.36 111.89,56.21
  Bottom 0.406: 108.08,15.89 108.08,17.58 C37.1 108.4,18.96 108.4,21.29 104.91,24.78 104.91,47.96 109.67,52.72 111.25,52.72 v111.89,53.36 | 108.08,15.89 106.17,15.89 104.56,17.5 D38.A | 108.08,15.89 IC19.2 | IC19.3 108.4,14.94 108.08,15.26 108.08,15.89
  pour Top (no thermals): 111.15,57.7 111.15,54.7 112.65,54.7 112.65,57.7
GND19  (via drill 0.3)
  Top 0.406: v123.89,53.36 123.89,56.21
  Bottom 0.406: 120.08,15.89 120.08,17.58 C39.1 120.4,18.96 120.4,21.29 116.91,24.78 116.91,47.96 121.67,52.72 123.25,52.72 v123.89,53.36 | 120.08,15.89 118.17,15.89 116.56,17.5 D40.A | 120.08,15.89 IC20.2 | IC20.3 120.4,14.94 120.08,15.26 120.08,15.89
  pour Top (no thermals): 123.15,57.7 123.15,54.7 124.65,54.7 124.65,57.7
IR-ADC  (via drill 0.3)
  Top 0.203: v13.35,103.81 13.35,110.48
  Bottom 0.203: R49.2 C49.2 13.03,66.35 14.3,67.62 14.3,69.53 13.98,69.84 IC9.1 13.67,69.84 14.3,70.48 14.3,73.34 9.86,77.78 9.86,100.32 v13.35,103.81
  pour Top (no thermals): 12.65,110.7 12.65,107.7 14.15,107.7 14.15,110.7
IR-ADC1  (via drill 0.3)
  Top 0.203: v25.35,103.81 25.35,110.48
  Bottom 0.203: R1.2 C2.2 25.03,66.35 26.3,67.62 26.3,69.53 25.98,69.84 IC1.1 25.67,69.84 26.3,70.48 26.3,73.34 21.86,77.78 21.86,100.32 v25.35,103.81
  pour Top (no thermals): 24.65,110.7 24.65,107.7 26.15,107.7 26.15,110.7
IR-ADC2  (via drill 0.3)
  Top 0.203: v37.35,103.81 37.35,110.48
  Bottom 0.203: R2.2 C4.2 37.03,66.35 38.3,67.62 38.3,69.53 37.98,69.84 IC2.1 37.67,69.84 38.3,70.48 38.3,73.34 33.86,77.78 33.86,100.32 v37.35,103.81
  pour Top (no thermals): 36.65,110.7 36.65,107.7 38.15,107.7 38.15,110.7
IR-ADC3  (via drill 0.3)
  Top 0.203: v49.35,103.81 49.35,110.48
  Bottom 0.203: R3.2 C6.2 49.03,66.35 50.3,67.62 50.3,69.53 49.98,69.84 IC3.1 49.67,69.84 50.3,70.48 50.3,73.34 45.86,77.78 45.86,100.32 v49.35,103.81
  pour Top (no thermals): 48.65,110.7 48.65,107.7 50.15,107.7 50.15,110.7
IR-ADC4  (via drill 0.3)
  Top 0.203: v61.35,103.81 61.35,110.48
  Bottom 0.203: R4.2 C8.2 61.03,66.35 62.3,67.62 62.3,69.53 61.98,69.84 IC4.1 61.67,69.84 62.3,70.48 62.3,73.34 57.86,77.78 57.86,100.32 v61.35,103.81
  pour Top (no thermals): 60.65,110.7 60.65,107.7 62.15,107.7 62.15,110.7
IR-ADC5  (via drill 0.3)
  Top 0.203: v73.35,103.81 73.35,110.48
  Bottom 0.203: R5.2 C10.2 73.03,66.35 74.3,67.62 74.3,69.53 73.98,69.84 IC5.1 73.67,69.84 74.3,70.48 74.3,73.34 69.86,77.78 69.86,100.32 v73.35,103.81
  pour Top (no thermals): 72.65,110.7 72.65,107.7 74.15,107.7 74.15,110.7
IR-ADC6  (via drill 0.3)
  Top 0.203: v85.35,103.81 85.35,110.48
  Bottom 0.203: R6.2 C12.2 85.03,66.35 86.3,67.62 86.3,69.53 85.98,69.84 IC6.1 85.67,69.84 86.3,70.48 86.3,73.34 81.86,77.78 81.86,100.32 v85.35,103.81
  pour Top (no thermals): 84.65,110.7 84.65,107.7 86.15,107.7 86.15,110.7
IR-ADC7  (via drill 0.3)
  Top 0.203: v97.35,103.81 97.35,110.48
  Bottom 0.203: R7.2 C14.2 97.03,66.35 98.3,67.62 98.3,69.53 97.98,69.84 IC7.1 97.67,69.84 98.3,70.48 98.3,73.34 93.86,77.78 93.86,100.32 v97.35,103.81
  pour Top (no thermals): 96.65,110.7 96.65,107.7 98.15,107.7 98.15,110.7
IR-ADC8  (via drill 0.3)
  Top 0.203: v109.35,103.81 109.35,110.48
  Bottom 0.203: R8.2 C16.2 109.03,66.35 110.3,67.62 110.3,69.53 109.98,69.84 IC8.1 109.67,69.84 110.3,70.48 110.3,73.34 105.86,77.78 105.86,100.32 v109.35,103.81
  pour Top (no thermals): 108.65,110.7 108.65,107.7 110.15,107.7 110.15,110.7
IR-ADC9  (via drill 0.3)
  Top 0.203: v121.35,103.81 121.35,110.48
  Bottom 0.203: R9.2 C18.2 121.03,66.35 122.3,67.62 122.3,69.53 121.98,69.84 IC10.1 121.67,69.84 122.3,70.48 122.3,73.34 117.86,77.78 117.86,100.32 v121.35,103.81
  pour Top (no thermals): 120.65,110.7 120.65,107.7 122.15,107.7 122.15,110.7
IR-ADC10  (via drill 0.3)
  Top 0.203: v13.35,50.81 13.35,57.48
  Bottom 0.203: R10.2 C20.2 13.03,13.35 14.3,14.62 14.3,16.52 13.98,16.84 IC11.1 13.67,16.84 14.3,17.48 14.3,20.34 9.86,24.78 9.86,47.32 v13.35,50.81
  pour Top (no thermals): 12.65,57.7 12.65,54.7 14.15,54.7 14.15,57.7
IR-ADC11  (via drill 0.3)
  Top 0.203: v25.35,50.81 25.35,57.48
  Bottom 0.203: R11.2 C22.2 25.03,13.35 26.3,14.62 26.3,16.52 25.98,16.84 IC12.1 25.67,16.84 26.3,17.48 26.3,20.34 21.86,24.78 21.86,47.32 v25.35,50.81
  pour Top (no thermals): 24.65,57.7 24.65,54.7 26.15,54.7 26.15,57.7
IR-ADC12  (via drill 0.3)
  Top 0.203: v37.35,50.81 37.35,57.48
  Bottom 0.203: R12.2 C24.2 37.03,13.35 38.3,14.62 38.3,16.52 37.98,16.84 IC13.1 37.67,16.84 38.3,17.48 38.3,20.34 33.86,24.78 33.86,47.32 v37.35,50.81
  pour Top (no thermals): 36.65,57.7 36.65,54.7 38.15,54.7 38.15,57.7
IR-ADC13  (via drill 0.3)
  Top 0.203: v49.35,50.81 49.35,57.48
  Bottom 0.203: R13.2 C26.2 49.03,13.35 50.3,14.62 50.3,16.52 49.98,16.84 IC14.1 49.67,16.84 50.3,17.48 50.3,20.34 45.86,24.78 45.86,47.32 v49.35,50.81
  pour Top (no thermals): 48.65,57.7 48.65,54.7 50.15,54.7 50.15,57.7
IR-ADC14  (via drill 0.3)
  Top 0.203: v61.35,50.81 61.35,57.48
  Bottom 0.203: R14.2 C28.2 61.03,13.35 62.3,14.62 62.3,16.52 61.98,16.84 IC15.1 61.67,16.84 62.3,17.48 62.3,20.34 57.86,24.78 57.86,47.32 v61.35,50.81
  pour Top (no thermals): 60.65,57.7 60.65,54.7 62.15,54.7 62.15,57.7
IR-ADC15  (via drill 0.3)
  Top 0.203: v73.35,50.81 73.35,57.48
  Bottom 0.203: R15.2 C30.2 73.03,13.35 74.3,14.62 74.3,16.52 73.98,16.84 IC16.1 73.67,16.84 74.3,17.48 74.3,20.34 69.86,24.78 69.86,47.32 v73.35,50.81
  pour Top (no thermals): 72.65,57.7 72.65,54.7 74.15,54.7 74.15,57.7
IR-ADC16  (via drill 0.3)
  Top 0.203: v85.35,50.81 85.35,57.48
  Bottom 0.203: R16.2 C32.2 85.03,13.35 86.3,14.62 86.3,16.52 85.98,16.84 IC17.1 85.67,16.84 86.3,17.48 86.3,20.34 81.86,24.78 81.86,47.32 v85.35,50.81
  pour Top (no thermals): 84.65,57.7 84.65,54.7 86.15,54.7 86.15,57.7
IR-ADC17  (via drill 0.3)
  Top 0.203: v97.35,50.81 97.35,57.48
  Bottom 0.203: R17.2 C34.2 97.03,13.35 98.3,14.62 98.3,16.52 97.98,16.84 IC18.1 97.67,16.84 98.3,17.48 98.3,20.34 93.86,24.78 93.86,47.32 v97.35,50.81
  pour Top (no thermals): 96.65,57.7 96.65,54.7 98.15,54.7 98.15,57.7
IR-ADC18  (via drill 0.3)
  Top 0.203: v109.35,50.81 109.35,57.48
  Bottom 0.203: R18.2 C36.2 109.03,13.35 110.3,14.62 110.3,16.52 109.98,16.84 IC19.1 109.67,16.84 110.3,17.48 110.3,20.34 105.86,24.78 105.86,47.32 v109.35,50.81
  pour Top (no thermals): 108.65,57.7 108.65,54.7 110.15,54.7 110.15,57.7
IR-ADC19  (via drill 0.3)
  Top 0.203: v121.35,50.81 121.35,57.48
  Bottom 0.203: R19.2 C38.2 121.03,13.35 122.3,14.62 122.3,16.52 121.98,16.84 IC20.1 121.67,16.84 122.3,17.48 122.3,20.34 117.86,24.78 117.86,47.32 v121.35,50.81
  pour Top (no thermals): 120.65,57.7 120.65,54.7 122.15,54.7 122.15,57.7
N$1
  Bottom 0.203: D4.C 20.27,65.77 20.27,66.03 20.59,66.03 22.49,67.94 IC1.4 22.81,66.35 C2.1 R1.1
N$2
  Bottom 0.203: D6.C 32.27,65.77 32.27,66.03 32.59,66.03 34.49,67.94 IC2.4 34.81,66.35 C4.1 R2.1
N$3
  Bottom 0.203: D8.C 44.27,65.77 44.27,66.03 44.59,66.03 46.49,67.94 IC3.4 46.81,66.35 C6.1 R3.1
N$4
  Bottom 0.203: D10.C 56.27,65.77 56.27,66.03 56.59,66.03 58.49,67.94 IC4.4 58.81,66.35 C8.1 R4.1
N$5
  Bottom 0.203: D12.C 68.27,65.77 68.27,66.03 68.59,66.03 70.49,67.94 IC5.4 70.81,66.35 C10.1 R5.1
N$6
  Bottom 0.203: D14.C 80.27,65.77 80.27,66.03 80.59,66.03 82.49,67.94 IC6.4 82.81,66.35 C12.1 R6.1
N$7
  Bottom 0.203: D16.C 92.27,65.77 92.27,66.03 92.59,66.03 94.49,67.94 IC7.4 94.81,66.35 C14.1 R7.1
N$8
  Bottom 0.203: D18.C 104.27,65.77 104.27,66.03 104.59,66.03 106.49,67.94 IC8.4 106.81,66.35 C16.1 R8.1
N$9
  Bottom 0.203: D20.C 116.27,65.77 116.27,66.03 116.59,66.03 118.49,67.94 IC10.4 118.81,66.35 C18.1 R9.1
N$10
  Bottom 0.203: D22.C 8.27,12.77 8.27,13.03 8.59,13.03 10.49,14.94 IC11.4 10.81,13.35 C20.1 R10.1
N$11
  Bottom 0.203: D24.C 20.27,12.77 20.27,13.03 20.59,13.03 22.49,14.94 IC12.4 22.81,13.35 C22.1 R11.1
N$12
  Bottom 0.203: D26.C 32.27,12.77 32.27,13.03 32.59,13.03 34.49,14.94 IC13.4 34.81,13.35 C24.1 R12.1
N$13
  Bottom 0.203: D28.C 44.27,12.77 44.27,13.03 44.59,13.03 46.49,14.94 IC14.4 46.81,13.35 C26.1 R13.1
N$14
  Bottom 0.203: D30.C 56.27,12.77 56.27,13.03 56.59,13.03 58.49,14.94 IC15.4 58.81,13.35 C28.1 R14.1
N$15
  Bottom 0.203: D32.C 68.27,12.77 68.27,13.03 68.59,13.03 70.49,14.94 IC16.4 70.81,13.35 C30.1 R15.1
N$16
  Bottom 0.203: D34.C 80.27,12.77 80.27,13.03 80.59,13.03 82.49,14.94 IC17.4 82.81,13.35 C32.1 R16.1
N$17
  Bottom 0.203: D36.C 92.27,12.77 92.27,13.03 92.59,13.03 94.49,14.94 IC18.4 94.81,13.35 C34.1 R17.1
N$18
  Bottom 0.203: D38.C 104.27,12.77 104.27,13.03 104.59,13.03 106.49,14.94 IC19.4 106.81,13.35 C36.1 R18.1
N$19
  Bottom 0.203: D40.C 116.27,12.77 116.27,13.03 116.59,13.03 118.49,14.94 IC20.4 118.81,13.35 C38.1 R19.1
N$114
  Bottom 0.203: D2.C 8.27,65.77 8.27,66.03 8.59,66.03 10.49,67.94 IC9.4 10.81,66.35 C49.1 R49.1
NC
  pour Bottom (no thermals): 14.15,110.7 14.15,107.7 12.65,107.7 12.65,110.7
NC1
  pour Bottom (no thermals): 26.15,110.7 26.15,107.7 24.65,107.7 24.65,110.7
NC2
  pour Bottom (no thermals): 38.15,110.7 38.15,107.7 36.65,107.7 36.65,110.7
NC3
  pour Bottom (no thermals): 50.15,110.7 50.15,107.7 48.65,107.7 48.65,110.7
NC4
  pour Bottom (no thermals): 62.15,110.7 62.15,107.7 60.65,107.7 60.65,110.7
NC5
  pour Bottom (no thermals): 74.15,110.7 74.15,107.7 72.65,107.7 72.65,110.7
NC6
  pour Bottom (no thermals): 86.15,110.7 86.15,107.7 84.65,107.7 84.65,110.7
NC7
  pour Bottom (no thermals): 98.15,110.7 98.15,107.7 96.65,107.7 96.65,110.7
NC8
  pour Bottom (no thermals): 110.15,110.7 110.15,107.7 108.65,107.7 108.65,110.7
NC9
  pour Bottom (no thermals): 122.15,110.7 122.15,107.7 120.65,107.7 120.65,110.7
NC10
  pour Bottom (no thermals): 14.15,57.7 14.15,54.7 12.65,54.7 12.65,57.7
NC11
  pour Bottom (no thermals): 26.15,57.7 26.15,54.7 24.65,54.7 24.65,57.7
NC12
  pour Bottom (no thermals): 38.15,57.7 38.15,54.7 36.65,54.7 36.65,57.7
NC13
  pour Bottom (no thermals): 50.15,57.7 50.15,54.7 48.65,54.7 48.65,57.7
NC14
  pour Bottom (no thermals): 62.15,57.7 62.15,54.7 60.65,54.7 60.65,57.7
NC15
  pour Bottom (no thermals): 74.15,57.7 74.15,54.7 72.65,54.7 72.65,57.7
NC16
  pour Bottom (no thermals): 86.15,57.7 86.15,54.7 84.65,54.7 84.65,57.7
NC17
  pour Bottom (no thermals): 98.15,57.7 98.15,54.7 96.65,54.7 96.65,57.7
NC18
  pour Bottom (no thermals): 110.15,57.7 110.15,54.7 108.65,54.7 108.65,57.7
NC19
  pour Bottom (no thermals): 122.15,57.7 122.15,54.7 120.65,54.7 120.65,57.7
RX+3V1  (via drill 0.3)
  Top 0.406: v22.81,104.13 23.45,104.77 23.45,108.9 22.81,109.53
  Bottom 0.406: IC1.5 22.97,70 22.97,71.17 C3.2 23.23,74.5 19.95,77.78 19.95,101.28 v22.81,104.13
  pour Top (no thermals): 22.15,110.7 22.15,107.7 23.65,107.7 23.65,110.7
RX+3V2  (via drill 0.3)
  Top 0.406: v34.81,104.13 35.45,104.77 35.45,108.9 34.81,109.53
  Bottom 0.406: IC2.5 34.97,70 34.97,71.17 C5.2 35.23,74.5 31.95,77.78 31.95,101.28 v34.81,104.13
  pour Top (no thermals): 34.15,110.7 34.15,107.7 35.65,107.7 35.65,110.7
RX+3V3  (via drill 0.3)
  Top 0.406: v10.81,104.13 11.45,104.77 11.45,108.9 10.81,109.53
  Bottom 0.406: IC9.5 10.97,70 10.97,71.17 C1.2 11.23,74.5 7.95,77.78 7.95,101.28 v10.81,104.13
  pour Top (no thermals): 10.15,110.7 10.15,107.7 11.65,107.7 11.65,110.7
RX+3V4  (via drill 0.3)
  Top 0.406: v46.81,104.13 47.45,104.77 47.45,108.9 46.81,109.53
  Bottom 0.406: IC3.5 46.97,70 46.97,71.17 C7.2 47.23,74.5 43.95,77.78 43.95,101.28 v46.81,104.13
  pour Top (no thermals): 46.15,110.7 46.15,107.7 47.65,107.7 47.65,110.7
RX+3V5  (via drill 0.3)
  Top 0.406: v58.81,104.13 59.45,104.77 59.45,108.9 58.81,109.53
  Bottom 0.406: IC4.5 58.97,70 58.97,71.17 C9.2 59.23,74.5 55.95,77.78 55.95,101.28 v58.81,104.13
  pour Top (no thermals): 58.15,110.7 58.15,107.7 59.65,107.7 59.65,110.7
RX+3V6  (via drill 0.3)
  Top 0.406: v70.81,104.13 71.44,104.77 71.44,108.9 70.81,109.53
  Bottom 0.406: IC5.5 70.97,70 70.97,71.17 C11.2 71.23,74.5 67.95,77.78 67.95,101.28 v70.81,104.13
  pour Top (no thermals): 70.15,110.7 70.15,107.7 71.65,107.7 71.65,110.7
RX+3V7  (via drill 0.3)
  Top 0.406: v82.81,104.13 83.44,104.77 83.44,108.9 82.81,109.53
  Bottom 0.406: IC6.5 82.97,70 82.97,71.17 C13.2 83.23,74.5 79.95,77.78 79.95,101.28 v82.81,104.13
  pour Top (no thermals): 82.15,110.7 82.15,107.7 83.65,107.7 83.65,110.7
RX+3V8  (via drill 0.3)
  Top 0.406: v94.81,104.13 95.44,104.77 95.44,108.9 94.81,109.53
  Bottom 0.406: IC7.5 94.97,70 94.97,71.17 C15.2 95.23,74.5 91.95,77.78 91.95,101.28 v94.81,104.13
  pour Top (no thermals): 94.15,110.7 94.15,107.7 95.65,107.7 95.65,110.7
RX+3V9  (via drill 0.3)
  Top 0.406: v106.81,104.13 107.44,104.77 107.44,108.9 106.81,109.53
  Bottom 0.406: IC8.5 106.97,70 106.97,71.17 C17.2 107.23,74.5 103.95,77.78 103.95,101.28 v106.81,104.13
  pour Top (no thermals): 106.15,110.7 106.15,107.7 107.65,107.7 107.65,110.7
RX+3V10  (via drill 0.3)
  Top 0.406: v118.81,104.13 119.44,104.77 119.44,108.9 118.81,109.53
  Bottom 0.406: IC10.5 118.97,70 118.97,71.17 C19.2 119.23,74.5 115.95,77.78 115.95,101.28 v118.81,104.13
  pour Top (no thermals): 118.15,110.7 118.15,107.7 119.65,107.7 119.65,110.7
RX+3V11  (via drill 0.3)
  Top 0.406: v10.81,51.13 11.45,51.77 11.45,55.89 10.81,56.53
  Bottom 0.406: IC11.5 10.97,17 10.97,18.17 C21.2 11.23,21.5 7.95,24.78 7.95,48.27 v10.81,51.13
  pour Top (no thermals): 10.15,57.7 10.15,54.7 11.65,54.7 11.65,57.7
RX+3V12  (via drill 0.3)
  Top 0.406: v22.81,51.13 23.45,51.77 23.45,55.89 22.81,56.53
  Bottom 0.406: IC12.5 22.97,17 22.97,18.17 C23.2 23.23,21.5 19.95,24.78 19.95,48.27 v22.81,51.13
  pour Top (no thermals): 22.15,57.7 22.15,54.7 23.65,54.7 23.65,57.7
RX+3V13  (via drill 0.3)
  Top 0.406: v34.81,51.13 35.45,51.77 35.45,55.89 34.81,56.53
  Bottom 0.406: IC13.5 34.97,17 34.97,18.17 C25.2 35.23,21.5 31.95,24.78 31.95,48.27 v34.81,51.13
  pour Top (no thermals): 34.15,57.7 34.15,54.7 35.65,54.7 35.65,57.7
RX+3V14  (via drill 0.3)
  Top 0.406: v46.81,51.13 47.45,51.77 47.45,55.89 46.81,56.53
  Bottom 0.406: IC14.5 46.97,17 46.97,18.17 C27.2 47.23,21.5 43.95,24.78 43.95,48.27 v46.81,51.13
  pour Top (no thermals): 46.15,57.7 46.15,54.7 47.65,54.7 47.65,57.7
RX+3V15  (via drill 0.3)
  Top 0.406: v58.81,51.13 59.45,51.77 59.45,55.89 58.81,56.53
  Bottom 0.406: IC15.5 58.97,17 58.97,18.17 C29.2 59.23,21.5 55.95,24.78 55.95,48.27 v58.81,51.13
  pour Top (no thermals): 58.15,57.7 58.15,54.7 59.65,54.7 59.65,57.7
RX+3V16  (via drill 0.3)
  Top 0.406: v70.81,51.13 71.44,51.77 71.44,55.89 70.81,56.53
  Bottom 0.406: IC16.5 70.97,17 70.97,18.17 C31.2 71.23,21.5 67.95,24.78 67.95,48.27 v70.81,51.13
  pour Top (no thermals): 70.15,57.7 70.15,54.7 71.65,54.7 71.65,57.7
RX+3V17  (via drill 0.3)
  Top 0.406: v82.81,51.13 83.44,51.77 83.44,55.89 82.81,56.53
  Bottom 0.406: IC17.5 82.97,17 82.97,18.17 C33.2 83.23,21.5 79.95,24.78 79.95,48.27 v82.81,51.13
  pour Top (no thermals): 82.15,57.7 82.15,54.7 83.65,54.7 83.65,57.7
RX+3V18  (via drill 0.3)
  Top 0.406: v94.81,51.13 95.44,51.77 95.44,55.89 94.81,56.53
  Bottom 0.406: IC18.5 94.97,17 94.97,18.17 C35.2 95.23,21.5 91.95,24.78 91.95,48.27 v94.81,51.13
  pour Top (no thermals): 94.15,57.7 94.15,54.7 95.65,54.7 95.65,57.7
RX+3V19  (via drill 0.3)
  Top 0.406: v106.81,51.13 107.44,51.77 107.44,55.89 106.81,56.53
  Bottom 0.406: IC19.5 106.97,17 106.97,18.17 C37.2 107.23,21.5 103.95,24.78 103.95,48.27 v106.81,51.13
  pour Top (no thermals): 106.15,57.7 106.15,54.7 107.65,54.7 107.65,57.7
RX+3V20  (via drill 0.3)
  Top 0.406: v118.81,51.13 119.44,51.77 119.44,55.89 118.81,56.53
  Bottom 0.406: IC20.5 118.97,17 118.97,18.17 C39.2 119.23,21.5 115.95,24.78 115.95,48.27 v118.81,51.13
  pour Top (no thermals): 118.15,57.7 118.15,54.7 119.65,54.7 119.65,57.7
TX+3V1  (via drill 0.3)
  Top 0.406: D3.A 20,70.84 20.91,71.75 21.54,71.75 22.81,73.02 22.81,74.92 19.95,77.78 v19.95,102.86
  Bottom 0.406: v19.95,102.86 23.76,106.67 26.3,106.67 27.89,108.26 27.89,109.21
  pour Bottom (no thermals): 28.65,110.7 28.65,107.7 27.15,107.7 27.15,110.7
TX+3V2  (via drill 0.3)
  Top 0.406: D5.A 32,70.84 32.91,71.75 33.54,71.75 34.81,73.02 34.81,74.92 31.95,77.78 v31.95,102.86
  Bottom 0.406: v31.95,102.86 35.76,106.67 38.3,106.67 39.89,108.26 39.89,109.21
  pour Bottom (no thermals): 40.65,110.7 40.65,107.7 39.15,107.7 39.15,110.7
TX+3V3  (via drill 0.3)
  Top 0.406: D1.A 8,70.84 8.9,71.75 9.54,71.75 10.81,73.02 10.81,74.92 7.95,77.78 v7.95,102.86
  Bottom 0.406: v7.95,102.86 11.76,106.67 14.3,106.67 15.89,108.26 15.89,109.21
  pour Bottom (no thermals): 16.65,110.7 16.65,107.7 15.15,107.7 15.15,110.7
TX+3V4  (via drill 0.3)
  Top 0.406: D7.A 44,70.84 44.91,71.75 45.54,71.75 46.81,73.02 46.81,74.92 43.95,77.78 v43.95,102.86
  Bottom 0.406: v43.95,102.86 47.76,106.67 50.3,106.67 51.89,108.26 51.89,109.21
  pour Bottom (no thermals): 52.65,110.7 52.65,107.7 51.15,107.7 51.15,110.7
TX+3V5  (via drill 0.3)
  Top 0.406: D9.A 56,70.84 56.91,71.75 57.54,71.75 58.81,73.02 58.81,74.92 55.95,77.78 v55.95,102.86
  Bottom 0.406: v55.95,102.86 59.76,106.67 62.3,106.67 63.89,108.26 63.89,109.21
  pour Bottom (no thermals): 64.65,110.7 64.65,107.7 63.15,107.7 63.15,110.7
TX+3V6  (via drill 0.3)
  Top 0.406: D11.A 68,70.84 68.91,71.75 69.54,71.75 70.81,73.02 70.81,74.92 67.95,77.78 v67.95,102.86
  Bottom 0.406: v67.95,102.86 71.76,106.67 74.3,106.67 75.89,108.26 75.89,109.21
  pour Bottom (no thermals): 76.65,110.7 76.65,107.7 75.15,107.7 75.15,110.7
TX+3V7  (via drill 0.3)
  Top 0.406: D13.A 80,70.84 80.91,71.75 81.54,71.75 82.81,73.02 82.81,74.92 79.95,77.78 v79.95,102.86
  Bottom 0.406: v79.95,102.86 83.76,106.67 86.3,106.67 87.89,108.26 87.89,109.21
  pour Bottom (no thermals): 88.65,110.7 88.65,107.7 87.15,107.7 87.15,110.7
TX+3V8  (via drill 0.3)
  Top 0.406: D15.A 92,70.84 92.91,71.75 93.54,71.75 94.81,73.02 94.81,74.92 91.95,77.78 v91.95,102.86
  Bottom 0.406: v91.95,102.86 95.76,106.67 98.3,106.67 99.89,108.26 99.89,109.21
  pour Bottom (no thermals): 100.65,110.7 100.65,107.7 99.15,107.7 99.15,110.7
TX+3V9  (via drill 0.3)
  Top 0.406: D17.A 104,70.84 104.91,71.75 105.54,71.75 106.81,73.02 106.81,74.92 103.95,77.78 v103.95,102.86
  Bottom 0.406: v103.95,102.86 107.76,106.67 110.3,106.67 111.89,108.26 111.89,109.21
  pour Bottom (no thermals): 112.65,110.7 112.65,107.7 111.15,107.7 111.15,110.7
TX+3V10  (via drill 0.3)
  Top 0.406: D19.A 116,70.84 116.91,71.75 117.54,71.75 118.81,73.02 118.81,74.92 115.95,77.78 v115.95,102.86
  Bottom 0.406: v115.95,102.86 119.76,106.67 122.3,106.67 123.89,108.26 123.89,109.21
  pour Bottom (no thermals): 124.65,110.7 124.65,107.7 123.15,107.7 123.15,110.7
TX+3V11  (via drill 0.3)
  Top 0.406: D21.A 8,17.84 8.9,18.75 9.54,18.75 10.81,20.02 10.81,21.92 7.95,24.78 v7.95,49.86
  Bottom 0.406: v7.95,49.86 11.76,53.67 14.3,53.67 15.89,55.26 15.89,56.21
  pour Bottom (no thermals): 16.65,57.7 16.65,54.7 15.15,54.7 15.15,57.7
TX+3V12  (via drill 0.3)
  Top 0.406: D23.A 20,17.84 20.91,18.75 21.54,18.75 22.81,20.02 22.81,21.92 19.95,24.78 v19.95,49.86
  Bottom 0.406: v19.95,49.86 23.76,53.67 26.3,53.67 27.89,55.26 27.89,56.21
  pour Bottom (no thermals): 28.65,57.7 28.65,54.7 27.15,54.7 27.15,57.7
TX+3V13  (via drill 0.3)
  Top 0.406: D25.A 32,17.84 32.91,18.75 33.54,18.75 34.81,20.02 34.81,21.92 31.95,24.78 v31.95,49.86
  Bottom 0.406: v31.95,49.86 35.76,53.67 38.3,53.67 39.89,55.26 39.89,56.21
  pour Bottom (no thermals): 40.65,57.7 40.65,54.7 39.15,54.7 39.15,57.7
TX+3V14  (via drill 0.3)
  Top 0.406: D27.A 44,17.84 44.91,18.75 45.54,18.75 46.81,20.02 46.81,21.92 43.95,24.78 v43.95,49.86
  Bottom 0.406: v43.95,49.86 47.76,53.67 50.3,53.67 51.89,55.26 51.89,56.21
  pour Bottom (no thermals): 52.65,57.7 52.65,54.7 51.15,54.7 51.15,57.7
TX+3V15  (via drill 0.3)
  Top 0.406: D29.A 56,17.84 56.91,18.75 57.54,18.75 58.81,20.02 58.81,21.92 55.95,24.78 v55.95,49.86
  Bottom 0.406: v55.95,49.86 59.76,53.67 62.3,53.67 63.89,55.26 63.89,56.21
  pour Bottom (no thermals): 64.65,57.7 64.65,54.7 63.15,54.7 63.15,57.7
TX+3V16  (via drill 0.3)
  Top 0.406: D31.A 68,17.84 68.91,18.75 69.54,18.75 70.81,20.02 70.81,21.92 67.95,24.78 v67.95,49.86
  Bottom 0.406: v67.95,49.86 71.76,53.67 74.3,53.67 75.89,55.26 75.89,56.21
  pour Bottom (no thermals): 76.65,57.7 76.65,54.7 75.15,54.7 75.15,57.7
TX+3V17  (via drill 0.3)
  Top 0.406: D33.A 80,17.84 80.91,18.75 81.54,18.75 82.81,20.02 82.81,21.92 79.95,24.78 v79.95,49.86
  Bottom 0.406: v79.95,49.86 83.76,53.67 86.3,53.67 87.89,55.26 87.89,56.21
  pour Bottom (no thermals): 88.65,57.7 88.65,54.7 87.15,54.7 87.15,57.7
TX+3V18  (via drill 0.3)
  Top 0.406: D35.A 92,17.84 92.91,18.75 93.54,18.75 94.81,20.02 94.81,21.92 91.95,24.78 v91.95,49.86
  Bottom 0.406: v91.95,49.86 95.76,53.67 98.3,53.67 99.89,55.26 99.89,56.21
  pour Bottom (no thermals): 100.65,57.7 100.65,54.7 99.15,54.7 99.15,57.7
TX+3V19  (via drill 0.3)
  Top 0.406: D37.A 104,17.84 104.91,18.75 105.54,18.75 106.81,20.02 106.81,21.92 103.95,24.78 v103.95,49.86
  Bottom 0.406: v103.95,49.86 107.76,53.67 110.3,53.67 111.89,55.26 111.89,56.21
  pour Bottom (no thermals): 112.65,57.7 112.65,54.7 111.15,54.7 111.15,57.7
TX+3V20  (via drill 0.3)
  Top 0.406: D39.A 116,17.84 116.91,18.75 117.54,18.75 118.81,20.02 118.81,21.92 115.95,24.78 v115.95,49.86
  Bottom 0.406: v115.95,49.86 119.76,53.67 122.3,53.67 123.89,55.26 123.89,56.21
  pour Bottom (no thermals): 124.65,57.7 124.65,54.7 123.15,54.7 123.15,57.7
TX-LED  (via drill 0.3)
  Top 0.406: D1.C 8,65.76 8.58,66.35 9.22,66.35 11.76,68.89 11.76,75.24 8.9,78.1 8.9,103.81 10.49,105.4 v10.49,106.67
  Bottom 0.406: v10.49,106.67 10.49,110.48
  pour Bottom (no thermals): 11.65,110.7 11.65,107.7 10.15,107.7 10.15,110.7
TX-LED1  (via drill 0.3)
  Top 0.406: D3.C 20,65.76 20.58,66.35 21.22,66.35 23.76,68.89 23.76,75.24 20.91,78.1 20.91,103.81 22.49,105.4 v22.49,106.67
  Bottom 0.406: v22.49,106.67 22.49,110.48
  pour Bottom (no thermals): 23.65,110.7 23.65,107.7 22.15,107.7 22.15,110.7
TX-LED2  (via drill 0.3)
  Top 0.406: D5.C 32,65.76 32.58,66.35 33.22,66.35 35.76,68.89 35.76,75.24 32.91,78.1 32.91,103.81 34.49,105.4 v34.49,106.67
  Bottom 0.406: v34.49,106.67 34.49,110.48
  pour Bottom (no thermals): 35.65,110.7 35.65,107.7 34.15,107.7 34.15,110.7
TX-LED3  (via drill 0.3)
  Top 0.406: D7.C 44,65.76 44.58,66.35 45.22,66.35 47.76,68.89 47.76,75.24 44.91,78.1 44.91,103.81 46.49,105.4 v46.49,106.67
  Bottom 0.406: v46.49,106.67 46.49,110.48
  pour Bottom (no thermals): 47.65,110.7 47.65,107.7 46.15,107.7 46.15,110.7
TX-LED4  (via drill 0.3)
  Top 0.406: D9.C 56,65.76 56.58,66.35 57.22,66.35 59.76,68.89 59.76,75.24 56.91,78.1 56.91,103.81 58.49,105.4 v58.49,106.67
  Bottom 0.406: v58.49,106.67 58.49,110.48
  pour Bottom (no thermals): 59.65,110.7 59.65,107.7 58.15,107.7 58.15,110.7
TX-LED5  (via drill 0.3)
  Top 0.406: D11.C 68,65.76 68.58,66.35 69.22,66.35 71.76,68.89 71.76,75.24 68.91,78.1 68.91,103.81 70.49,105.4 v70.49,106.67
  Bottom 0.406: v70.49,106.67 70.49,110.48
  pour Bottom (no thermals): 71.65,110.7 71.65,107.7 70.15,107.7 70.15,110.7
TX-LED6  (via drill 0.3)
  Top 0.406: D13.C 80,65.76 80.58,66.35 81.22,66.35 83.76,68.89 83.76,75.24 80.91,78.1 80.91,103.81 82.49,105.4 v82.49,106.67
  Bottom 0.406: v82.49,106.67 82.49,110.48
  pour Bottom (no thermals): 83.65,110.7 83.65,107.7 82.15,107.7 82.15,110.7
TX-LED7  (via drill 0.3)
  Top 0.406: D15.C 92,65.76 92.58,66.35 93.22,66.35 95.76,68.89 95.76,75.24 92.91,78.1 92.91,103.81 94.49,105.4 v94.49,106.67
  Bottom 0.406: v94.49,106.67 94.49,110.48
  pour Bottom (no thermals): 95.65,110.7 95.65,107.7 94.15,107.7 94.15,110.7
TX-LED8  (via drill 0.3)
  Top 0.406: D17.C 104,65.76 104.58,66.35 105.22,66.35 107.76,68.89 107.76,75.24 104.91,78.1 104.91,103.81 106.49,105.4 v106.49,106.67
  Bottom 0.406: v106.49,106.67 106.49,110.48
  pour Bottom (no thermals): 107.65,110.7 107.65,107.7 106.15,107.7 106.15,110.7
TX-LED9  (via drill 0.3)
  Top 0.406: D19.C 116,65.76 116.58,66.35 117.22,66.35 119.76,68.89 119.76,75.24 116.91,78.1 116.91,103.81 118.49,105.4 v118.49,106.67
  Bottom 0.406: v118.49,106.67 118.49,110.48
  pour Bottom (no thermals): 119.65,110.7 119.65,107.7 118.15,107.7 118.15,110.7
TX-LED10  (via drill 0.3)
  Top 0.406: D21.C 8,12.76 8.58,13.35 9.22,13.35 11.76,15.89 11.76,22.24 8.9,25.1 8.9,50.81 10.49,52.4 v10.49,53.67
  Bottom 0.406: v10.49,53.67 10.49,57.48
  pour Bottom (no thermals): 11.65,57.7 11.65,54.7 10.15,54.7 10.15,57.7
TX-LED11  (via drill 0.3)
  Top 0.406: D23.C 20,12.76 20.58,13.35 21.22,13.35 23.76,15.89 23.76,22.24 20.91,25.1 20.91,50.81 22.49,52.4 v22.49,53.67
  Bottom 0.406: v22.49,53.67 22.49,57.48
  pour Bottom (no thermals): 23.65,57.7 23.65,54.7 22.15,54.7 22.15,57.7
TX-LED12  (via drill 0.3)
  Top 0.406: D25.C 32,12.76 32.58,13.35 33.22,13.35 35.76,15.89 35.76,22.24 32.91,25.1 32.91,50.81 34.49,52.4 v34.49,53.67
  Bottom 0.406: v34.49,53.67 34.49,57.48
  pour Bottom (no thermals): 35.65,57.7 35.65,54.7 34.15,54.7 34.15,57.7
TX-LED13  (via drill 0.3)
  Top 0.406: D27.C 44,12.76 44.58,13.35 45.22,13.35 47.76,15.89 47.76,22.24 44.91,25.1 44.91,50.81 46.49,52.4 v46.49,53.67
  Bottom 0.406: v46.49,53.67 46.49,57.48
  pour Bottom (no thermals): 47.65,57.7 47.65,54.7 46.15,54.7 46.15,57.7
TX-LED14  (via drill 0.3)
  Top 0.406: D29.C 56,12.76 56.58,13.35 57.22,13.35 59.76,15.89 59.76,22.24 56.91,25.1 56.91,50.81 58.49,52.4 v58.49,53.67
  Bottom 0.406: v58.49,53.67 58.49,57.48
  pour Bottom (no thermals): 59.65,57.7 59.65,54.7 58.15,54.7 58.15,57.7
TX-LED15  (via drill 0.3)
  Top 0.406: D31.C 68,12.76 68.58,13.35 69.22,13.35 71.76,15.89 71.76,22.24 68.91,25.1 68.91,50.81 70.49,52.4 v70.49,53.67
  Bottom 0.406: v70.49,53.67 70.49,57.48
  pour Bottom (no thermals): 71.65,57.7 71.65,54.7 70.15,54.7 70.15,57.7
TX-LED16  (via drill 0.3)
  Top 0.406: D33.C 80,12.76 80.58,13.35 81.22,13.35 83.76,15.89 83.76,22.24 80.91,25.1 80.91,50.81 82.49,52.4 v82.49,53.67
  Bottom 0.406: v82.49,53.67 82.49,57.48
  pour Bottom (no thermals): 83.65,57.7 83.65,54.7 82.15,54.7 82.15,57.7
TX-LED17  (via drill 0.3)
  Top 0.406: D35.C 92,12.76 92.58,13.35 93.22,13.35 95.76,15.89 95.76,22.24 92.91,25.1 92.91,50.81 94.49,52.4 v94.49,53.67
  Bottom 0.406: v94.49,53.67 94.49,57.48
  pour Bottom (no thermals): 95.65,57.7 95.65,54.7 94.15,54.7 94.15,57.7
TX-LED18  (via drill 0.3)
  Top 0.406: D37.C 104,12.76 104.58,13.35 105.22,13.35 107.76,15.89 107.76,22.24 104.91,25.1 104.91,50.81 106.49,52.4 v106.49,53.67
  Bottom 0.406: v106.49,53.67 106.49,57.48
  pour Bottom (no thermals): 107.65,57.7 107.65,54.7 106.15,54.7 106.15,57.7
TX-LED19  (via drill 0.3)
  Top 0.406: D39.C 116,12.76 116.58,13.35 117.22,13.35 119.76,15.89 119.76,22.24 116.91,25.1 116.91,50.81 118.49,52.4 v118.49,53.67
  Bottom 0.406: v118.49,53.67 118.49,57.48
  pour Bottom (no thermals): 119.65,57.7 119.65,54.7 118.15,54.7 118.15,57.7

## Text on the board
Top: TX | TX | TX | TX | TX | TX | TX | TX | TX | TX | TX | TX | TX | TX | TX | TX | TX | TX | TX | TX
Bottom: RX | RX | RX | RX | RX | RX | RX | RX | RX | RX | RX | RX | RX | RX | RX | RX | RX | RX | RX | RX